# EAGLE board M_B_adapter_414 (EAGLE 9.6.2)
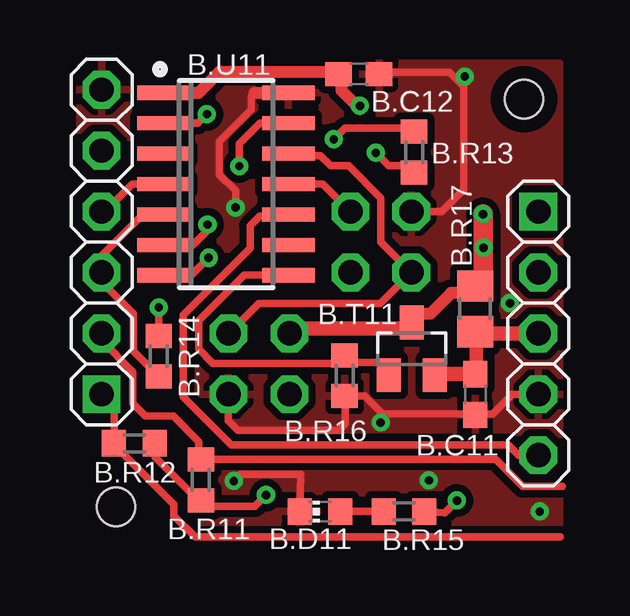
[diagram p0: board, top side]
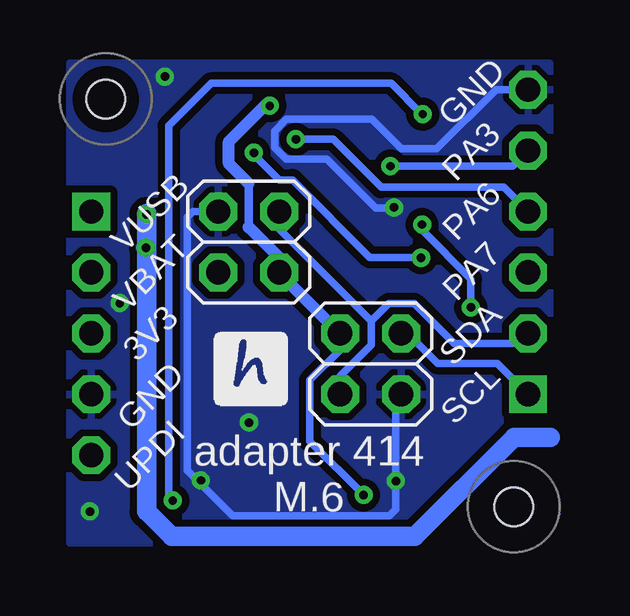
[diagram p1: board, bottom side, seen from below]

No outline drawn. Coordinates in mm, seen from the top.
Copper layers (1*16): Top 0.035mm / dielectric 1.5mm / Bottom 0.035mm
Design rules "default *": minimum track width 10mil, minimum drill 0.35mm, track to track 12mil, track to pad 12mil, pad to pad 12mil, via to via 12mil, smd to smd 10mil, copper to edge 15mil, drill to drill 40mil, minimum pad ring 10mil, minimum via ring 8mil, stop-mask expansion 4mil, vias tented up to drill 14mil, thermal gap 10mil
Holes 1.6 mm at 2,2 19,19
tRestrict: area 18,18 to 20,20; area 1,1 to 3,3
bRestrict: area 18,18 to 20,20; area 1,1 to 3,3

## Footprints (pad centres in the part's own frame; a part is rotated, then mirrored left to right if it is on the bottom)
C0603 = smd 1.1 x 1: 1 -0.85,0; 2 0.85,0
CHIP-LED0603 = smd 1.1 x 1: A1 0,-0.85; C1 0,0.85
1X05 = drill 1.016 pad 1.575 square: 1 -5.08,0 | drill 1.016 pad 1.575 octagon: 2 -2.54,0; 3 0,0; 4 2.54,0; 5 5.08,0
1X06 = drill 1.016 pad 1.575 square: 1 -6.35,0 | drill 1.016 pad 1.575 octagon: 2 -3.81,0; 3 -1.27,0; 4 1.27,0; 5 3.81,0; 6 6.35,0
2X02 = drill 1.016 pad 1.575 octagon: 1 -1.27,-1.27; 2 -1.27,1.27; 3 1.27,-1.27; 4 1.27,1.27
R0603 = smd 1 x 1.1: 1 -0.85,0; 2 0.85,0
FUSE = smd 1.3 x 1.5: 1 -0.95,0; 2 0.95,0
SO23 = smd 1 x 1.4: D 0,1.1; G -0.95,-1.1; S 0.95,-1.1
SO14 = smd 0.6 x 2.2: 1 -3.81,-2.6; 2 -2.54,-2.6; 3 -1.27,-2.6; 4 0,-2.6; 5 1.27,-2.6; 6 2.54,-2.6; 7 3.81,-2.6; 8 3.81,2.6; 9 2.54,2.6; 10 1.27,2.6; 11 0,2.6; 12 -1.27,2.6; 13 -2.54,2.6; 14 -3.81,2.6

## Placement (x,y rotation side)
B.C11  100n  [C0603]  16.97,6.68 270 top
B.C12  100n  [C0603]  12.12,20.04 0 top
B.D11  [CHIP-LED0603]  10.5,1.8 90 top
B.J1  [1X05]  19.6,9.23 270 top
B.J2  [1X06]  1.4,13.04 90 top
B.J3  [2X02]  7.96,7.96 270 bottom
B.J4  [2X02]  13.04,13.04 270 bottom
B.R11  2k2  [R0603]  5.54,3.12 270 top
B.R12  2k2  [R0603]  2.77,4.65 0 top
B.R13  alt RX 0R  [R0603]  14.43,16.79 270 top
B.R14  alt TX 0R  [R0603]  3.78,8.28 90 top
B.R15  1k  [R0603]  14,1.8 0 top
B.R16  100k  [R0603]  11.53,7.47 270 top
B.R17  alt fuse or 0R  [FUSE]  16.97,10.25 90 top
B.T11  NX3008  [SO23]  14.33,8.59 0 top
B.U11  AT414  [SO14]  6.59,15.45 270 top

## Library data of the parts
B.C11 B.C12 = rcl; SPICEPREFIX: C
B.D11 = led
B.J1-B.J4 = pinhead2
B.R11-B.R16 = rcl; SPICEPREFIX: R
B.R17 B.T11 = hugo
B.U11 = atmel

## Nets
GND: B.C11.2 B.C12.2 B.D11.C1 B.J1.4 B.J2.6 B.J3.4 B.J4.1 B.R16.2 B.U11.14
N$1: B.R14.2 B.U11.6
N$2: B.R13.2 B.U11.7
N$3: B.R16.1 B.T11.G B.U11.8
N$4: B.C11.1 B.J1.3 B.R17.1 B.T11.S
N$5: B.R15.2 B.U11.2
PA1: B.D11.A1 B.R15.1
PA3: B.J2.5 B.U11.13
PA6: B.J2.4 B.R13.1 B.U11.4
PA7: B.J2.3 B.R14.1 B.U11.5
SCL: B.J2.1 B.J3.2 B.J4.3 B.R12.1 B.U11.12
SDA: B.J2.2 B.J3.3 B.J4.2 B.R11.1 B.U11.11
UPDI: B.J1.5 B.U11.10
VBAT: B.J1.2
VCC: B.C12.1 B.J3.1 B.J4.4 B.R11.2 B.R12.2 B.R17.2 B.T11.D B.U11.1
VUSB: B.J1.1

## Tracks (layer width: path | path; a pad name or v marks a point on that pad's centre or on a via)
GND  (via drill 0.35)
  Top 0.305: B.J3.4 6.69,5.59 7.09,5.19 11.3,5.19 11.55,5.45 11.55,6.6 B.R16.2 12.37,6.62 13.11,5.88 17.7,5.88 18.51,6.69 B.J1.4 | B.J4.1 15.58,14.31 16.49,15.22 16.49,19.51 15.89,20.12 13.04,20.12 B.C12.2 | v6.91,3.07 7.18,3.35 9.7,3.35 B.D11.C1 | 7.77,19.26 7.63,19.12 7.63,18.55 6.3,17.22 6.3,15.86 6.99,15.18 v6.99,14.48 | B.U11.14
  Top 0.508: 7.77,19.26 B.U11.14
  Bottom 0.305: B.J4.1 15.38,14.31 15.61,14.08 15.61,3.52 13.72,1.63 7.17,1.63 6.91,1.89 v6.91,3.07 6.91,6.47 B.J3.4 | B.J2.6 2.73,19.39 5.2,16.93 6.68,16.93 7.91,18.16 11.47,18.16 11.96,17.67 11.96,16.98 11.47,16.49 9.78,16.49 7.76,14.46 7,14.46 v6.99,14.48
  other vias: 16.54,19.94 13.03,5.51 15.04,3.1 19.66,1.8 18.41,10.49
  pour Bottom (isolate 0.254): 0.5,20.5 0.5,0.5 20.5,0.5 20.5,20.5
  pour Top (isolate 0.254): 0.5,20.5 0.5,0.5 20.5,0.5 20.5,20.5
N$1  (via drill 0.35)
  Top 0.305: v3.79,10.31 B.R14.2 | v5.82,13.77 5.82,13.54 5.19,12.91 B.U11.6
  Bottom 0.305: v3.79,10.31 3.79,11.51 5.82,13.54 v5.82,13.77
N$2  (via drill 0.35)
  Top 0.305: B.U11.7 5.12,11.65 v5.86,12.38 | v12.83,16.76 13.37,16.22 14.15,16.22 B.R13.2
  Bottom 0.305: v5.86,12.38 5.88,12.4 7.99,12.4 11.21,15.62 11.76,15.62 12.83,16.69 v12.83,16.76
N$3
  Top 0.305: B.T11.G 13.38,8.01 11.84,8.01 B.R16.1 11.2,7.99 6.03,7.99 5.45,8.57 5.45,9.76 7.35,11.67 9.16,11.67 B.U11.8
N$4
  Top 0.305: B.C11.1 17.14,7.71 17.14,9.23
  Top 0.508: B.R17.1 B.C11.1
  Top 0.61: B.J1.3 17.14,9.23 | B.C11.1 15.28,7.53 B.T11.S
  Bottom 0.813: B.J1.3 19.6,9
N$5  (via drill 0.35)
  Top 0.305: v5.79,18.37 5.42,18 B.U11.2 | v16.2,2.26 15.7,1.75 B.R15.2
  Bottom 0.305: v5.79,18.37 5.82,18.37 7.11,19.66 14.61,19.66 16.38,17.88 16.38,2.41 16.23,2.26 v16.2,2.26
PA1
  Top 0.305: B.R15.1 B.D11.A1
PA3  (via drill 0.35)
  Top 0.305: B.U11.13 7.99,18 7.14,17.14 v7.14,16.2
  Bottom 0.305: B.J2.5 2.04,16.2 v7.14,16.2
PA6  (via drill 0.35)
  Top 0.305: B.U11.4 2.67,15.46 1.53,14.31 B.J2.4 | v11.07,17.32 11.54,17.79 14.28,17.79 B.R13.1
  Bottom 0.305: B.J2.4 2.42,15.33 7.53,15.33 9.53,17.32 v11.07,17.32
PA7
  Top 0.305: B.U11.5 3.97,14.21 3.13,14.21 1.4,12.47 B.J2.3 1.4,11.37 2.72,10.05 2.72,8.49 B.R14.1
SCL
  Top 0.305: B.U11.12 9.27,16.65 10.51,16.65 10.94,16.22 11.7,16.22 13.04,14.88 13.04,13.03 B.J4.3 13.02,10.47 7.95,10.47 6.71,9.23 B.J3.2 | B.J2.1 1.93,6.16 1.93,4.66 B.R12.1 1.92,4.6 4.42,2.1 4.42,1.63 5.3,0.74 20.52,0.74
  Bottom 0.305: B.J2.1 2.69,7.99 5.17,7.99 6.41,9.23 B.J3.2
SDA
  Top 0.305: B.U11.11 10.62,15.46 B.J4.2 | B.J2.2 1.4,8.93 2.7,7.62 2.7,6.32 3.23,5.79 4.38,5.79 5.46,4.71 5.46,4.05 B.R11.1 17.82,3.97 18.95,2.85 20.6,2.85
  Bottom 0.305: 7.93,9.75 11.77,13.58 B.J4.2 | B.J2.2 1.6,9.23 2.04,8.8 4.47,8.8 6.15,10.47 7.21,10.47 7.93,9.75 | 7.93,9.75 7.93,8.75 9.23,7.45 B.J3.3
UPDI
  Top 0.305: B.U11.10 9.13,14.13 8,14.13 7.59,13.72 7.59,12.78 4.81,10 4.81,6.58 6.81,4.58 18.36,4.58 18.79,4.15 B.J1.5
VCC  (via drill 0.35)
  Top 0.305: B.T11.D 14.07,9.43 | B.J3.1 9.43,9.43 | B.R12.2 3.62,4.29 3.64,4.27 3.64,4.07 5.44,2.27 B.R11.2 | 5.84,2.58 B.R11.2 | 17.02,11.25 B.R17.2 | B.R11.2 5.79,2.02 7.79,2.02 v8.26,2.49
  Top 0.508: B.U11.1 5.44,19.27 6.3,20.12 11.18,20.12 B.C12.1 11.39,19.91 11.39,19.37 12.04,18.72 v12.16,18.72 | B.T11.D 14.68,10.04 15.09,10.04 15.97,10.92 16.69,10.92 B.R17.2
  Top 0.61: 14.07,9.43 9.43,9.43
  Top 0.813: B.R17.2 17.3,11.53 v17.3,14.2
  Bottom 0.305: v8.26,2.49 10.49,4.72 10.49,7.28 9.23,8.54 B.J3.1
  Bottom 0.356: 13.04,13.65 13.04,15.47
  Bottom 0.508: B.J3.1 9.26,9.23 11.77,11.74 B.J4.4 11.77,12.38 13.04,13.65 | 13.04,15.47 13.87,16.3 13.87,17.23 12.27,18.82 v12.16,18.72
  Bottom 0.813: v17.3,14.2 17.3,14.22 | v17.3,14.2 17.3,1.8 16.26,0.76 6.12,0.76 1.98,4.9 0.48,4.9 | v17.32,12.8 17.3,12.83 v17.3,14.2

## Text on the board
bPlace: GND | PA3 | PA6 | VUSB | PA7 | VBAT | SDA | 3V3 | SCL | GND | UPDI | adapter 414 / M.6